# Altium PCB Balance Board.PcbDoc
Units mm, origin at the board's own origin, x right, y up, seen from the top; angles counter-clockwise.
Board outline 64.5 x 42.5 mm, 2 copper layers (Top Layer, Bottom Layer); 128 components, 72 nets, 307 pads, 49 vias.
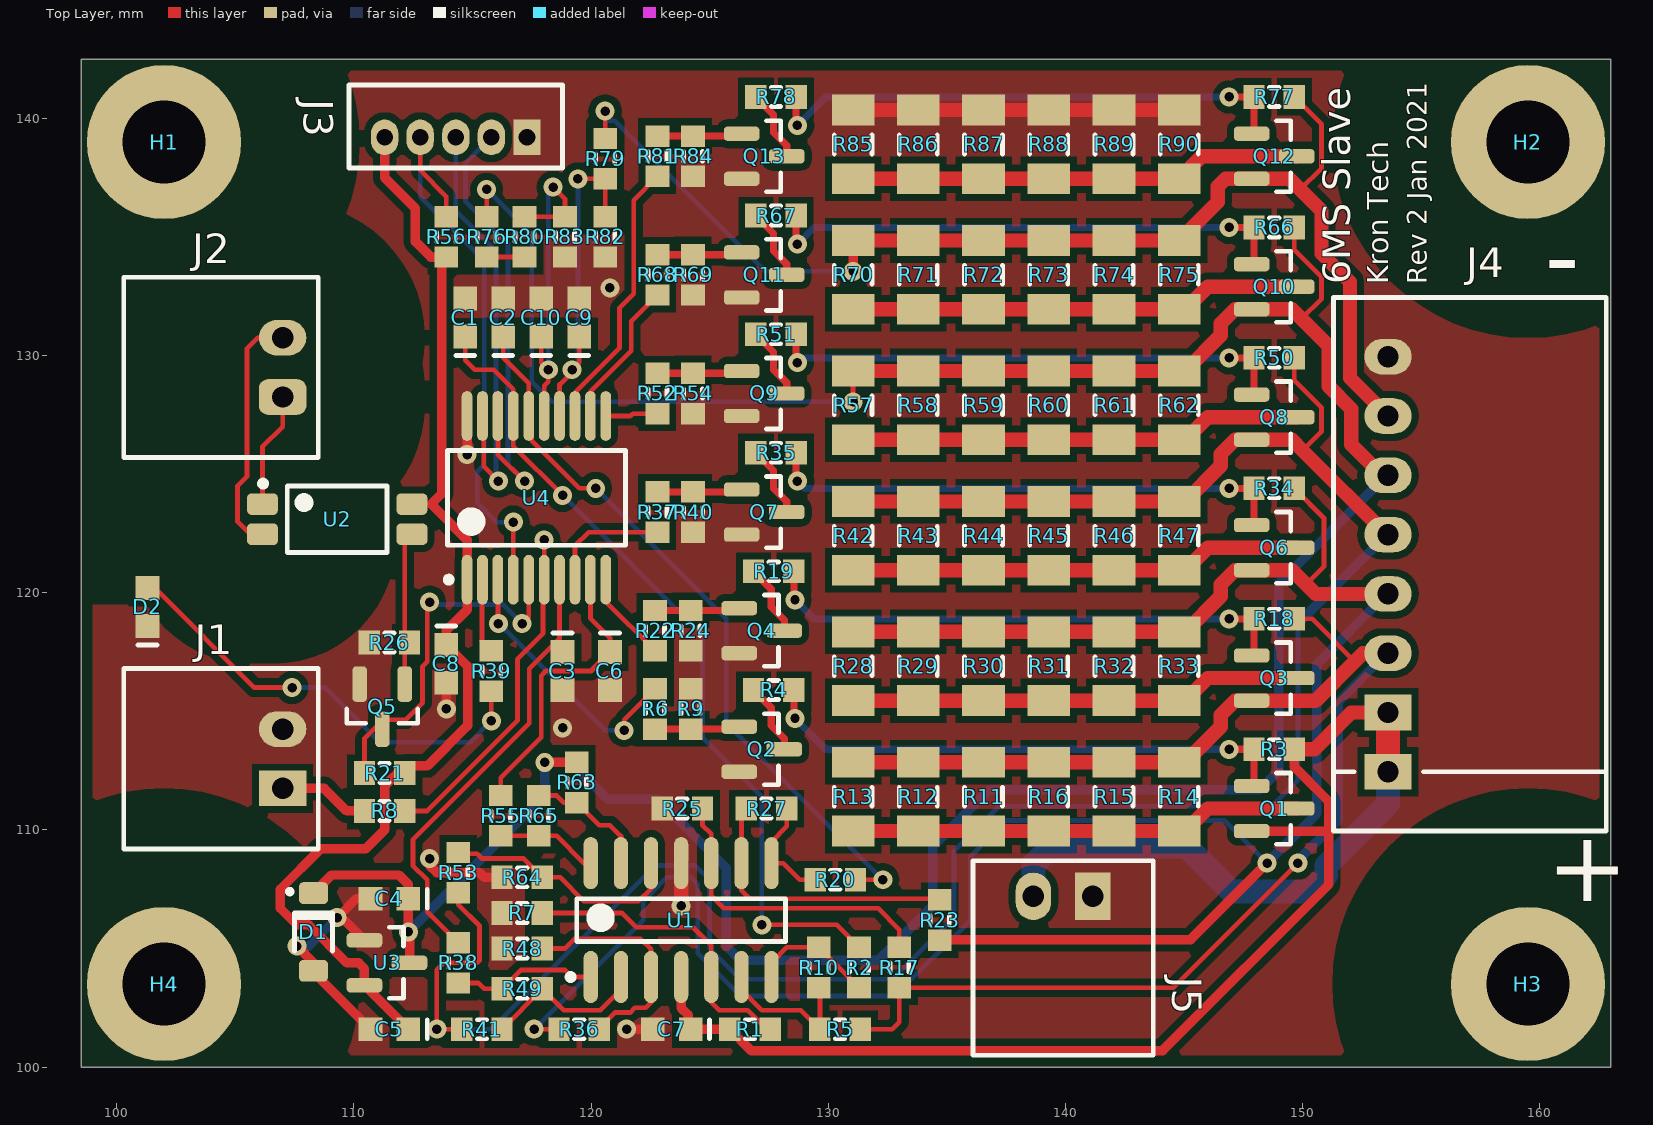
[diagram p0: Top Layer view]
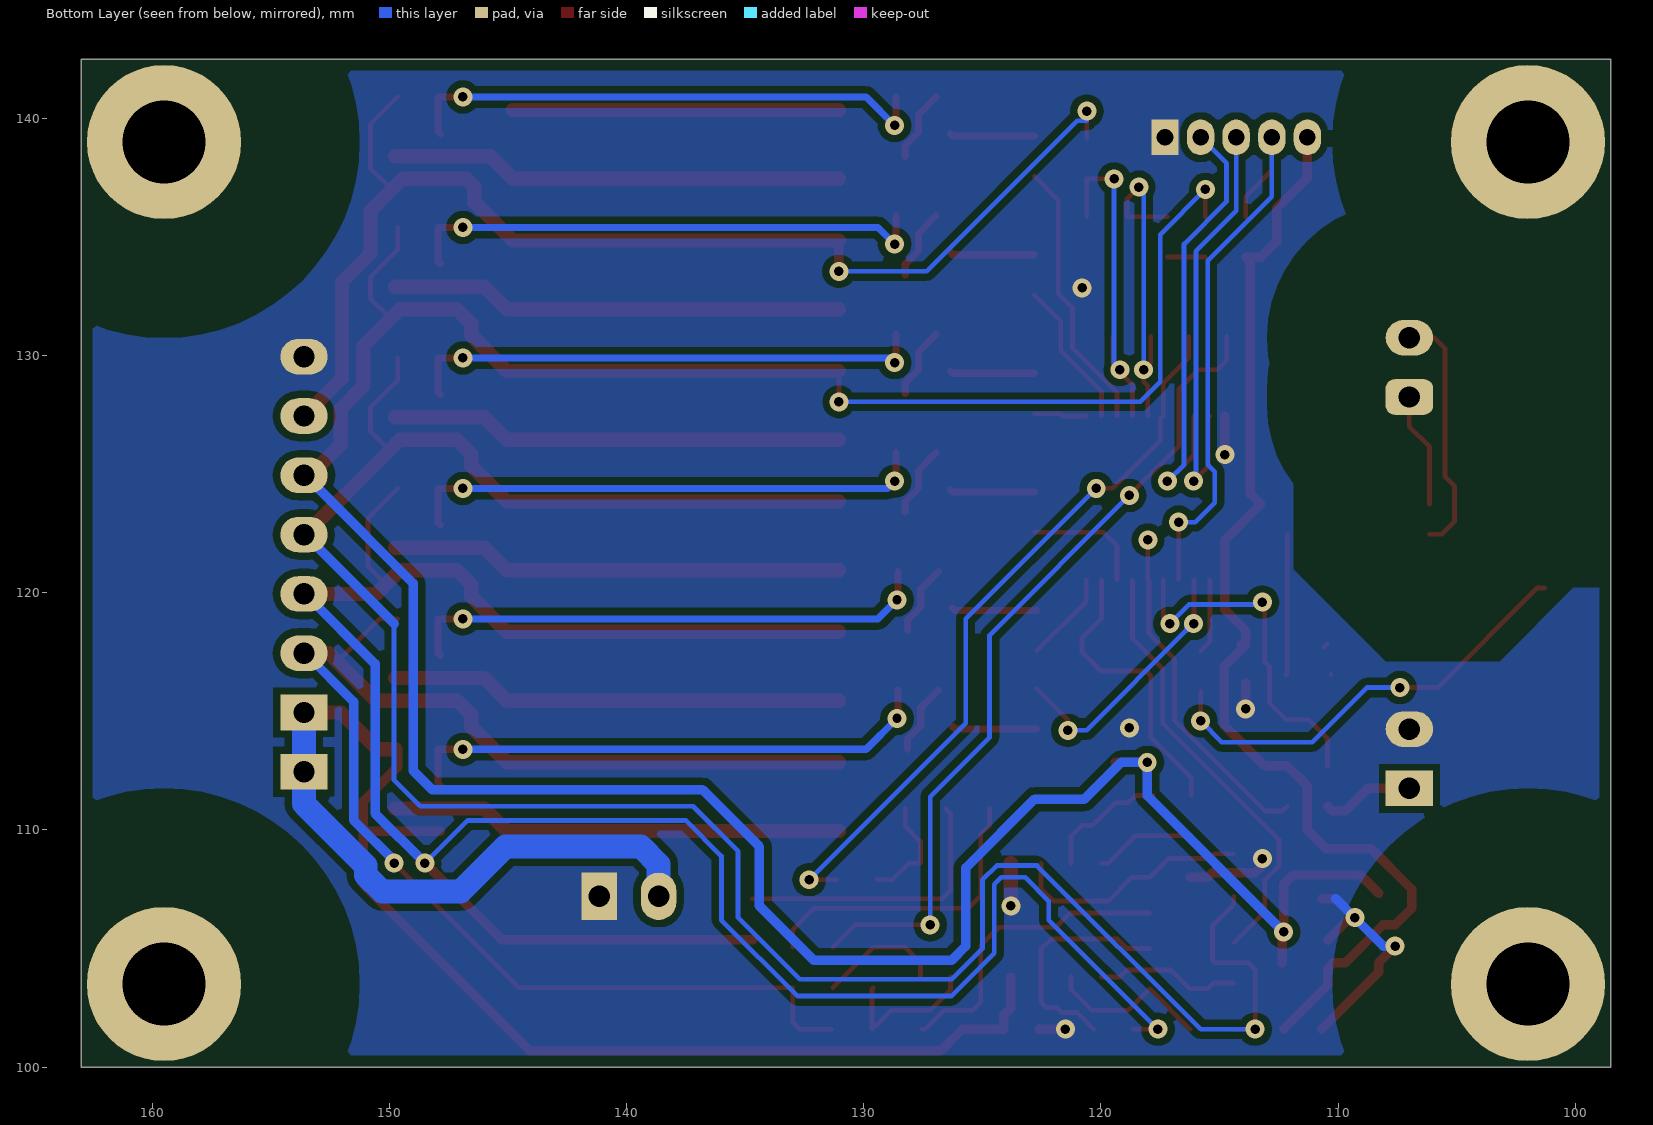
[diagram p1: Bottom Layer view, seen from below]

## Layer stack, top to bottom
Top Solder: solder mask 0.0102, Solder Resist, Dk 3.5
Top Layer: signal copper 0.0356
Dielectric1: dielectric 0.32, FR-4, Dk 4.8
Bottom Layer: signal copper 0.0356
Bottom Solder: solder mask 0.0102, Solder Resist, Dk 3.5

## Board outline
98.5,100 98.5,142.5 163,142.5 163,100

## Design rules (kind name [scope] priority, off if disabled: settings)
Clearance Clearance_ISO [InNetClass('ISO') vs NOT InNetClass('ISO')] p1: gap=5 ignorepadtopadclearanceinfootprint=FALSE except(0: Arc-Hole Track-Hole SMDPad-Hole THPad-Hole Via-Hole Fill-Hole Poly-Hole Region-Hole Text-Hole)
Clearance Clearance_Chassis [InNetClass('CHASSIS') vs NOT InNetClass('CHASSIS')] p2: gap=5 ignorepadtopadclearanceinfootprint=FALSE except(0: Arc-Hole Track-Hole SMDPad-Hole THPad-Hole Via-Hole Fill-Hole Poly-Hole Region-Hole Text-Hole)
Clearance Clearance_Plane [InPoly] p3: gap=0.3 ignorepadtopadclearanceinfootprint=FALSE except(0: Arc-Hole Track-Hole SMDPad-Hole THPad-Hole Via-Hole Fill-Hole Poly-Hole Region-Hole Text-Hole)
Clearance [All] p4: gap=0.2 ignorepadtopadclearanceinfootprint=FALSE except(0: Arc-Hole Track-Hole SMDPad-Hole THPad-Hole Via-Hole Fill-Hole Poly-Hole Region-Hole Text-Hole)
HoleSize [All] p1 off: absolutevalues=TRUE maxlimit=2.54 minlimit=0.025 maxpercent=80.000 minpercent=20.000
PolygonConnect PolygonConnect_Direct [IsVia    or (IsPad AND NOT OnLayer('Multi Layer'))] p1: connectstyle=Direct reliefconductorwidth=0.254 reliefentries=4 polygonreliefangle="90 Angle" airgapwidth=0.254
PolygonConnect [All] p2: connectstyle=Relief reliefconductorwidth=0.254 reliefentries=4 polygonreliefangle="90 Angle" airgapwidth=0.254
RoutingVias [All] p1: holewidth=0.3 width=0.6 viastyle="Through Hole" minholewidth=0.3 minwidth=0.6 maxholewidth=10 maxwidth=20
SilkToSilkClearance [All] p1 off: silktosilkclearance=0.254
SilkToSolderMaskClearance [IsPad] p1 off: minsilkscreentomaskgap=0.254 clearancetoexposedcopper=TRUE
SolderMaskExpansion [All] p1: expansion=0.102 istentingtop=FALSE
Width [All] p1: maxlimit=10 minlimit=0.2 preferedwidth=0.3
27 further rules are at their usual default settings.

## Classes and differential pairs
net class CHASSIS: CHASSIS CHASSIS1 CHASSIS2 CHASSIS3 CHASSIS4
net class ISO: NetJ2_1 NetJ2_2

## Components (designator, comment, footprint, x,y, rotation, side; value= is the part's Value field where it differs from the comment)
C1 "Cap Ceramic 0.1u 25V X7R 0603" CAPC1608N-0603 114.7,131.6 r90 top value=0.1u
C2 "Cap Ceramic 0.1u 25V X7R 0603" CAPC1608N-0603 116.3,131.6 r90 top value=0.1u
C3 "Cap Ceramic 0.1u 25V X7R 0603" CAPC1608N-0603 118.8,116.7 r270 top value=0.1u
C4 "Cap Ceramic 0.1u 25V X7R 0603" CAPC1608N-0603 111.5,107.1 r180 top value=0.1u
C5 "Cap Ceramic 0.1u 25V X7R 0603" CAPC1608N-0603 111.5,101.6 r180 top value=0.1u
C6 "Cap Ceramic 0.1u 25V X7R 0603" CAPC1608N-0603 120.8,116.7 r270 top value=0.1u
C7 "Cap Ceramic 0.1u 50V X7R 0603" CAPC1608N-0603 123.4,101.6 r180 top value=0.1u
C8 "Cap Ceramic 0.1u 25V X7R 0603" CAPC1608N-0603 113.9,117 r270 top value=0.1u
C9 "Cap Ceramic 0.1u 25V X7R 0603" CAPC1608N-0603 119.5,131.6 r90 top value=0.1u
C10 "Cap Ceramic 0.1u 25V X7R 0603" CAPC1608N-0603 117.9,131.6 r90 top value=0.1u
D1 "Diode Zener 10V 0.5W SOD-123" SOD-123 108.3,105.7 r270 top value=10V
D2 "LED Green 160° 0603" CAPC1608N-0603 101.3,119.4 r90 top value="LG Q971-KN-1"
H1 "Mounting Hole" "HOLE MOUNTING 3MM"#1 102.1,138.9 r0 top
H2 "Mounting Hole" "HOLE MOUNTING 3MM"#2 165.5,139 r0 top
H3 "Mounting Hole" "HOLE MOUNTING 3MM"#2 165.5,103.5 r0 top
H4 "Mounting Hole" "HOLE MOUNTING 3MM"#3 102,103.5 r0 top
J1 "Conn Header 2.5mm RA 2-Pos EH" S2B-EH#1 107,113 r90 top value=S2B-EH(LF)(SN)
J2 "Conn Header 2.5mm RA 2-Pos EH" S2B-EH#2 107,129.5 r90 top value=S2B-EH(LF)(SN)
J3 "Conn Header 1.5mm Vert 5-Pos ZH" B5B-ZR 114.3,139.2 r180 top value=B5B-ZR(LF)(SN)
J4 "Conn Header 2.5mm RA 7-Pos XH" S7B-XH&78B-XH-REV 153.6,122.45 r270 top value=S7B-XH-A(LF)(SN)
J5 "Conn Header 2.5mm RA 2-Pos EH" S2B-EH#1 139.9,107.2 r180 top value=S2B-EH(LF)(SN)
Q1 "Tran PNP Darl 30V 500mA SOT-23" SOT23-3N 148.8,110.9 r0 top value=MMBTA64-7-F
Q2 "Tran NPN 40V 200mA SOT-23" SOT23-3N 127.2,113.4 r0 top value=MMBT3904
Q3 "Tran PNP Darl 30V 500mA SOT-23" SOT23-3N 148.8,116.4 r0 top value=MMBTA64-7-F
Q4 "Tran NPN 40V 200mA SOT-23" SOT23-3N 127.2,118.4 r0 top value=MMBT3904
Q5 "Tran NPN 40V 200mA SOT-23" SOT23-3N 111.2,115.2 r270 top value=MMBT3904
Q6 "Tran PNP Darl 30V 500mA SOT-23" SOT23-3N 148.8,121.9 r0 top value=MMBTA64-7-F
Q7 "Tran NPN 40V 200mA SOT-23" SOT23-3N 127.3,123.4 r0 top value=MMBT3904
Q8 "Tran PNP Darl 30V 500mA SOT-23" SOT23-3N 148.8,127.4 r0 top value=MMBTA64-7-F
Q9 "Tran NPN 40V 200mA SOT-23" SOT23-3N 127.3,128.4 r0 top value=MMBT3904
Q10 "Tran PNP Darl 30V 500mA SOT-23" SOT23-3N 148.8,132.9 r0 top value=MMBTA64-7-F
Q11 "Tran NPN 40V 200mA SOT-23" SOT23-3N 127.3,133.4 r0 top value=MMBT3904
Q12 "Tran PNP Darl 30V 500mA SOT-23" SOT23-3N 148.8,138.4 r0 top value=MMBTA64-7-F
Q13 "Tran NPN 40V 200mA SOT-23" SOT23-3N 127.3,138.4 r0 top value=MMBT3904
R1 "Res 499K 1/10W 1% 0603" RESC1608N-0603 126.7,101.6 r0 top value=499K
R2 "Res 10.0K 1/10W 1% 0603" RESC1608N-0603 131.3,104.2 r90 top value=10K0
R3 "Res 100K 1/10W 1% 0603" RESC1608N-0603 148.8,113.4 r0 top value=100K
R4 "Res 280K 1/10W 1% 0603" RESC1608N-0603 127.7,115.9 r180 top value=280K
R5 "Res 499K 1/10W 1% 0603" RESC1608N-0603 130.5,101.6 r180 top value=499K
R6 "Res 10.0K 1/10W 1% 0603" RESC1608N-0603 122.7,115.1 r90 top value=10K0
R7 "Res 200K 1/10W 1% 0603" RESC1608N-0603 117.1,106.5 r0 top value=200K
R8 "Res 1.00K 1/10W 1% 0603" RESC1608N-0603 111.3,110.8 r0 top value=1K00
R9 "Res 10.0K 1/10W 1% 0603" RESC1608N-0603 124.2,115.1 r270 top value=10K0
R10 "Res 200K 1/10W 1% 0603" RESC1608N-0603 129.6,104.2 r90 top value=200K
R11 "Res 121R 1/4W 1% 1206" RESC3216N-1206 136.55,111.4 r270 top value=121R
R12 "Res 121R 1/4W 1% 1206" RESC3216N-1206 133.8,111.4 r270 top value=121R
R13 "Res 121R 1/4W 1% 1206" RESC3216N-1206 131.05,111.4 r270 top value=121R
R14 "Res 121R 1/4W 1% 1206" RESC3216N-1206 144.8,111.4 r270 top value=121R
R15 "Res 121R 1/4W 1% 1206" RESC3216N-1206 142.05,111.4 r270 top value=121R
R16 "Res 121R 1/4W 1% 1206" RESC3216N-1206 139.3,111.4 r270 top value=121R
R17 "Res 499K 1/10W 1% 0603" RESC1608N-0603 133,104.2 r90 top value=499K
R18 "Res 100K 1/10W 1% 0603" RESC1608N-0603 148.8,118.9 r0 top value=100K
R19 "Res 280K 1/10W 1% 0603" RESC1608N-0603 127.7,120.9 r180 top value=280K
R20 "Res 10.0K 1/10W 1% 0603" RESC1608N-0603 130.3,107.9 r0 top value=10K0
R21 "Res 2.32K 1/10W 1% 0603" RESC1608N-0603 111.3,112.4 r0 top value=2K32
R22 "Res 10.0K 1/10W 1% 0603" RESC1608N-0603 122.7,118.4 r270 top value=10K0
R23 "Res 499K 1/10W 1% 0603" RESC1608N-0603 134.7,106.2 r90 top value=499K
R24 "Res 10.0K 1/10W 1% 0603" RESC1608N-0603 124.2,118.4 r90 top value=10K0
R25 "Res 200K 1/10W 1% 0603" RESC1608N-0603 123.85,110.9 r0 top value=200K
R26 "Res 4.99K 1/10W 1% 0603" RESC1608N-0603 111.5,117.9 r0 top value=4K99
R27 "Res 200K 1/10W 1% 0603" RESC1608N-0603 127.4,110.9 r0 top value=200K
R28 "Res 121R 1/4W 1% 1206" RESC3216N-1206 131.05,116.9 r270 top value=121R
R29 "Res 121R 1/4W 1% 1206" RESC3216N-1206 133.8,116.9 r270 top value=121R
R30 "Res 121R 1/4W 1% 1206" RESC3216N-1206 136.55,116.9 r270 top value=121R
R31 "Res 121R 1/4W 1% 1206" RESC3216N-1206 139.3,116.9 r270 top value=121R
R32 "Res 121R 1/4W 1% 1206" RESC3216N-1206 142.05,116.9 r270 top value=121R
R33 "Res 121R 1/4W 1% 1206" RESC3216N-1206 144.8,116.9 r270 top value=121R
R34 "Res 100K 1/10W 1% 0603" RESC1608N-0603 148.8,124.4 r0 top value=100K
R35 "Res 280K 1/10W 1% 0603" RESC1608N-0603 127.8,125.9 r180 top value=280K
R36 "Res 499K 1/10W 1% 0603" RESC1608N-0603 119.5,101.6 r0 top value=499K
R37 "Res 10.0K 1/10W 1% 0603" RESC1608N-0603 122.8,123.4 r270 top value=10K0
R38 "Res 10.0K 1/10W 1% 0603" RESC1608N-0603 114.4,104.4 r90 top value=10K0
R39 "Res 120R 1/10W 1% 0603" RESC1608N-0603 115.8,116.7 r90 top value=120R
R40 "Res 10.0K 1/10W 1% 0603" RESC1608N-0603 124.3,123.4 r90 top value=10K0
R41 "Res 499K 1/10W 1% 0603" RESC1608N-0603 115.4,101.6 r0 top value=499K
R42 "Res 121R 1/4W 1% 1206" RESC3216N-1206 131.05,122.4 r270 top value=121R
R43 "Res 121R 1/4W 1% 1206" RESC3216N-1206 133.8,122.4 r270 top value=121R
R44 "Res 121R 1/4W 1% 1206" RESC3216N-1206 136.55,122.4 r270 top value=121R
R45 "Res 121R 1/4W 1% 1206" RESC3216N-1206 139.3,122.4 r270 top value=121R
R46 "Res 121R 1/4W 1% 1206" RESC3216N-1206 142.05,122.4 r270 top value=121R
R47 "Res 121R 1/4W 1% 1206" RESC3216N-1206 144.8,122.4 r270 top value=121R
R48 "Res 200K 1/10W 1% 0603" RESC1608N-0603 117.1,105 r0 top value=200K
R49 "Res 200K 1/10W 1% 0603" RESC1608N-0603 117.1,103.3 r180 top value=200K
R50 "Res 100K 1/10W 1% 0603" RESC1608N-0603 148.8,129.9 r0 top value=100K
R51 "Res 100K 1/10W 1% 0603" RESC1608N-0603 127.8,130.9 r180 top value=100K
R52 "Res 10.0K 1/10W 1% 0603" RESC1608N-0603 122.8,128.4 r270 top value=10K0
R53 "Res 499K 1/10W 1% 0603" RESC1608N-0603 114.4,108.2 r90 top value=499K
R54 "Res 10.0K 1/10W 1% 0603" RESC1608N-0603 124.3,128.4 r90 top value=10K0
R55 "Res 10.0K 1/10W 1% 0603" RESC1608N-0603 116.2,110.6 r90 top value=10K0
R56 "Res 10.0K 1/10W 1% 0603" RESC1608N-0603 113.9,135 r270 top value=10K0
R57 "Res 121R 1/4W 1% 1206" RESC3216N-1206 131.05,127.9 r270 top value=121R
R58 "Res 121R 1/4W 1% 1206" RESC3216N-1206 133.8,127.9 r270 top value=121R
R59 "Res 121R 1/4W 1% 1206" RESC3216N-1206 136.55,127.9 r270 top value=121R
R60 "Res 121R 1/4W 1% 1206" RESC3216N-1206 139.3,127.9 r270 top value=121R
R61 "Res 121R 1/4W 1% 1206" RESC3216N-1206 142.05,127.9 r270 top value=121R
R62 "Res 121R 1/4W 1% 1206" RESC3216N-1206 144.8,127.9 r270 top value=121R
R63 "Res 499K 1/10W 1% 0603" RESC1608N-0603 119.4,112 r270 top value=499K
R64 "Res 200K 1/10W 1% 0603" RESC1608N-0603 117.1,108 r0 top value=200K
R65 "Res 200K 1/10W 1% 0603" RESC1608N-0603 117.8,110.6 r270 top value=200K
R66 "Res 100K 1/10W 1% 0603" RESC1608N-0603 148.8,135.4 r0 top value=100K
R67 "Res 100K 1/10W 1% 0603" RESC1608N-0603 127.8,135.9 r180 top value=100K
R68 "Res 10.0K 1/10W 1% 0603" RESC1608N-0603 122.8,133.4 r270 top value=10K0
R69 "Res 10.0K 1/10W 1% 0603" RESC1608N-0603 124.3,133.4 r90 top value=10K0
R70 "Res 121R 1/4W 1% 1206" RESC3216N-1206 131.05,133.4 r270 top value=121R
R71 "Res 121R 1/4W 1% 1206" RESC3216N-1206 133.8,133.4 r270 top value=121R
R72 "Res 121R 1/4W 1% 1206" RESC3216N-1206 136.55,133.4 r270 top value=121R
R73 "Res 121R 1/4W 1% 1206" RESC3216N-1206 139.3,133.4 r270 top value=121R
R74 "Res 121R 1/4W 1% 1206" RESC3216N-1206 142.05,133.4 r270 top value=121R
R75 "Res 121R 1/4W 1% 1206" RESC3216N-1206 144.8,133.4 r270 top value=121R
R76 "Res 100K 1/10W 1% 0603" RESC1608N-0603 115.6,135 r90 top value=100K
R77 "Res 100K 1/10W 1% 0603" RESC1608N-0603 148.8,140.9 r0 top value=100K
R78 "Res 3.32K 1/10W 1% 0603" RESC1608N-0603 127.8,140.9 r180 top value=3K32
R79 "Res 150K 1/10W 1% 0603" RESC1608N-0603 120.6,138.3 r90 top value=150K
R80 "Res 280K 1/10W 1% 0603" RESC1608N-0603 117.2,135 r270 top value=280K
R81 "Res 10.0K 1/10W 1% 0603" RESC1608N-0603 122.8,138.4 r270 top value=10K0
R82 "Res 100K 1/10W 1% 0603" RESC1608N-0603 120.6,135 r90 top value=100K
R83 "Res 100K 1/10W 1% 0603" RESC1608N-0603 118.9,135 r90 top value=100K
R84 "Res 10.0K 1/10W 1% 0603" RESC1608N-0603 124.3,138.4 r90 top value=10K0
R85 "Res 121R 1/4W 1% 1206" RESC3216N-1206 131.05,138.9 r270 top value=121R
R86 "Res 121R 1/4W 1% 1206" RESC3216N-1206 133.8,138.9 r270 top value=121R
R87 "Res 121R 1/4W 1% 1206" RESC3216N-1206 136.55,138.9 r270 top value=121R
R88 "Res 121R 1/4W 1% 1206" RESC3216N-1206 139.3,138.9 r270 top value=121R
R89 "Res 121R 1/4W 1% 1206" RESC3216N-1206 142.05,138.9 r270 top value=121R
R90 "Res 121R 1/4W 1% 1206" RESC3216N-1206 144.8,138.9 r270 top value=121R
U1 "IC Op-Amp Low Power RRIO 32V 14-SOIC" SOIC127P600-14N 123.8,106.2 r90 top value=LP324DR
U2 "IC Optocoupler Bi-Di LED 80-300% SOIC4" MFP127P4.4-4 109.3,123.1 r0 top value=80-300%
U3 "IC Voltage Reg LDO 3.3V SOT-23" SOT23-3N 111.4,104.4 r0 top value=3.3V
U4 "IC Micro PIC16F1828 20-SSOP" SOP65P780X200-20N 117.7,124 r90 top value=PIC16F1828-I/SS

## Footprints (in the part's own frame and the unit in brackets; to place one, negate y for a bottom-side part, rotate by r counter-clockwise, add the part's x,y. Pads: shape width x height; smd on the part's side, far side on the other; paste and mask are expansions set on the pad)
B5B-ZR [mm] "CONN HEADER ZH TOP 5POS 1.5MM"
  rect 1.15x1.5 hole 0.7: 1(-3,0)
  oval 1.15x1.5 hole 0.7: 2(-1.5,0) 3(0,0) 4(1.5,0) 5(3,0)
  silkscreen extent -4.5,-2.2 4.5,1.3, body extent -4.5,-2.2 4.5,1.3, height 4.5
CAPC1608N-0603 [mm] "Chip Capacitor, Body 1.6x0.8mm, IPC Medium Density"
  rect 1x1 smd: 1(-0.8,0) 2(0.8,0)
  silkscreen extent -1.6,-0.4 -1.6,0.4, body extent -0.87,-0.48 0.87,0.48, height 0.85
"HOLE MOUNTING 3MM"#1 [mm] "3mm hole with 300mil pad"
  round 6.5 hole 3.5: 1(-0.1,0.1)
"HOLE MOUNTING 3MM"#2 [mm] "3mm hole with 300mil pad"
  round 6.5 hole 3.5: 1(-6,0)
"HOLE MOUNTING 3MM"#3 [mm] "3mm hole with 300mil pad"
  round 6.5 hole 3.5: 1(0,0)
MFP127P4.4-4 [mm] "Mini Flat Pack, 4-Leads, Body 4.4x2.8mm, Pitch 1.27mm"
  rrect40% 1.3x0.9 smd: 1(-3.15,0.635) 2(-3.15,-0.635) 3(3.15,-0.635) 4(3.15,0.635)
  silkscreen extent -3.25,-1.4 2.1,1.62, body extent -2.2,-1.4 2.2,1.4, height 2.1
RESC1608N-0603 [mm] "Chip Resistor, Body 1.6x0.8mm, IPC Medium Density"
  rect 0.9x1 smd: 1(-0.85,0) 2(0.85,0)
  silkscreen extent -0.2,-0.4 0.2,0.4, body extent -0.85,-0.48 0.85,0.48, height 0.6
RESC3216N-1206 [mm] "Chip Resistor, Body 3.2x1.6mm, IPC Medium Density"
  rect 1.3x1.8 smd: 1(-1.45,0) 2(1.45,0)
  silkscreen extent -0.4,-0.8 0.4,0.8, body extent -1.68,-0.87 1.68,0.87, height 0.71
S2B-EH#1 [mm] "CONN HEADER EH SIDE 2POS 2.5MM"
  rect 1.5x2 hole 0.9: 1(-1.25,0)
  oval 1.5x2 hole 0.9: 2(1.25,0)
  silkscreen extent -3.8,-1.5 3.8,6.7, body extent -3.75,-1.5 3.75,6.7, height 4.2
S2B-EH#2 [mm] "CONN HEADER EH SIDE 2POS 2.5MM"
  rrect50% 1.5x2 hole 0.9: 1(-1.25,0)
  oval 1.5x2 hole 0.9: 2(1.25,0)
  silkscreen extent -3.8,-1.5 3.8,6.7, body extent -3.75,-1.5 3.75,6.7, height 4.2
S7B-XH&78B-XH-REV [mm] "CONN HEADER XH SIDE 7 OR 8POS 2.5MM"
  rect 1.5x2 hole 0.9: 0(10,0) 1(7.5,0)
  oval 1.5x2 hole 0.9: 2(5,0) 3(2.5,0) 4(0,0) 5(-2.5,0) 6(-5,0) 7(-7.5,0)
  silkscreen extent -10,-2.3 12.5,9.2, body extent -9.95,-2.3 9.95,9.2, height 6.15
SOD-123 [mil] "Small Outline Diode"
  rrect40% 36x48 smd: 1(-64.5,0) 2(64.5,0)
  silkscreen extent -71,-43 31,31, body extent -55,-35 55,35, height 53
SOIC127P600-14N [mm] "SOIC, 14-Leads, Body 8.7x3.9mm, Pitch 1.27mm, IPC Medium Density"
  oval 2.2x0.6 smd: 1(-2.4,3.81) 2(-2.4,2.54) 3(-2.4,1.27) 4(-2.4,0) 5(-2.4,-1.27) 6(-2.4,-2.54) 7(-2.4,-3.81) 8(2.4,-3.81) 9(2.4,-2.54) 10(2.4,-1.27) 11(2.4,0) 12(2.4,1.27) 13(2.4,2.54) 14(2.4,3.81)
  silkscreen extent -2.52,-4.4 0.9,4.78, body extent -2,-4.38 2,4.38, height 1.75
SOP65P780X200-20N [mm] "SOP, 20-Leads, Body 7.5x5.6mm (max), Pitch 0.65mm, IPC Medium Density"
  oval 2.1x0.45 smd: 1(-3.45,2.925) 2(-3.45,2.275) 3(-3.45,1.625) 4(-3.45,0.975) 5(-3.45,0.325) 6(-3.45,-0.325) 7(-3.45,-0.975) 8(-3.45,-1.625) 9(-3.45,-2.275) 10(-3.45,-2.925) 11(3.45,-2.925) 12(3.45,-2.275) 13(3.45,-1.625) 14(3.45,-0.975) 15(3.45,-0.325) 16(3.45,0.325) 17(3.45,0.975) 18(3.45,1.625) 19(3.45,2.275) 20(3.45,2.925)
  silkscreen extent -3.57,-3.75 2,3.82, body extent -2.8,-3.75 2.8,3.75, height 2
SOT23-3N [mm] "SOT23, 3-Leads, Body 2.9x1.3mm, Pitch 0.95mm, Lead Span 2.5mm, IPC Medium Density"
  rrect50% 1.5x0.6 smd: 1(-0.95,0.95) 2(-0.95,-0.95) 3(0.95,0)
  silkscreen extent 0.1,-1.5 0.7,1.5, body extent -0.7,-1.5 0.7,1.5, height 1.1

## Part data
C1 C2 C3 C4 C5 C6 C8 C9 C10: library part C0603C104K3RACTU, Dist=Digi-Key, Dist P/N=399-1281-1-ND, Mfg=Kemet, Mfgr P/N=C0603C104K3RACTU, Price=0.079
C7: library part CC0603KRX7R9BB104, Dist=Digi-Key, Dist P/N=311-1344-1-ND, Mfg=Yageo, Mfgr P/N=CC0603KRX7R9BB104, Price=0.35
D1: library part BZT52C10-TP, Datasheet=http://61.222.192.61/mccsemi/up_pdf/MMSZ5221-MMSZ5259(SOD123).pdf, Dist=Digi-Key, Dist P/N=BZT52C10-TPMSCT-ND, Mfg=MCC, Mfgr P/N=BZT52C10-TP, Price=0.38
D2: library part "LG Q971-KN-1", Dist=Digi-Key, Dist P/N=475-1409-1-ND, HelpURL=http://catalog.osram-os.com/catalogue/catalogue.do;jsessionid=60BD7AD44689CBF6EBE1906F01C7D3CB?act=downloadFile&favOid=0200000300015082000200b6, Mfg=Osram, Mfgr P/N="LG Q971-KN-1", Price=0.11
H1 H2 H3 H4: library part "Hole Mounting"
J1 J2 J5: library part S2B-EH(LF)(SN), Dist=Digi-Key, Dist P/N=455-1625-ND, HelpURL=http://www.jst-mfg.com/product/pdf/eng/eEH.pdf, Mfg=JST, Mfgr P/N=S2B-EH(LF)(SN), Price=0.16
J3: library part B5B-ZR(LF)(SN), Dist=Digi-Key, Dist P/N=455-1660-ND, HelpURL=http://www.jst-mfg.com/product/pdf/eng/eZH.pdf, Mfg=JST, Mfgr P/N=B5B-ZR(LF)(SN), Price=0.2
J4: library part S8B-XH-A(LF)(SN)_CUST, Dist=Digi-Key, Dist P/N=455-2240-ND, HelpURL=http://www.jst-mfg.com/product/pdf/eng/eXH.pdf, Mfg=JST, Mfgr P/N=S7B-XH-A(LF)(SN), Price=0.43
Q1 Q3 Q6 Q8 Q10 Q12: library part MMBTA64-7-F, Dist=Digi-Key, Dist P/N=MMBTA64-FDICT-ND, HelpURL=http://www.diodes.com/datasheets/ds30055.pdf, Mfg="Diodes Inc", Mfgr P/N=MMBTA64-7-F, Price=0.27
Q2 Q4 Q5 Q7 Q9 Q11 Q13: library part MMBT3904, Datasheet=http://www.fairchildsemi.com/ds/MM/MMBT3904.pdf, Dist=Digi-Key, Dist P/N=MMBT3904FSCT-ND, Mfg=Fairchild, Mfgr P/N=MMBT3904, Price=0.37
R1 R5 R17 R23 R36 R41 R53 R63: library part ERJ-3EKF4993V, Dist=Digi-Key, Dist P/N=P499KHCT-ND, Mfg=Panasonic, Mfgr P/N=ERJ-3EKF4993V, Price=0.05
R2 R6 R9 R20 R22 R24 R37 R38 R40 R52 R54 R55 R56 R68 R69 R81 R84: library part ERJ-3EKF1002V, Dist=Digi-Key, Dist P/N=P10.0KHCT-ND, Mfg=Panasonic, Mfgr P/N=ERJ-3EKF1002V, Price=0.05
R3 R18 R34 R50 R51 R66 R67 R76 R77 R82 R83: library part ERJ-3EKF1003V, Dist=Digi-Key, Dist P/N=P100KHCT-ND, Mfg=Panasonic, Mfgr P/N=ERJ-3EKF1003V, Price=0.05
R4 R19 R35 R80: library part ERJ-3EKF2803V, Dist=Digi-Key, Dist P/N=P280KHCT-ND, Mfg=Panasonic, Mfgr P/N=ERJ-3EKF2803V, Price=0.05
R7 R10 R25 R27 R48 R49 R64 R65: library part ERJ-3EKF2003V, Dist=Digi-Key, Dist P/N=P200KHCT-ND, Mfg=Panasonic, Mfgr P/N=ERJ-3EKF2003V, Price=0.05
R8: library part ERJ-3EKF1001V, Dist=Digi-Key, Dist P/N=P1.00KHCT-ND, Mfg=Panasonic, Mfgr P/N=ERJ-3EKF1001V, Price=0.05
R11 R12 R13 R14 R15 R16 R28 R29 R30 R31 R32 R33 R42 R43 R44 R45 R46 R47 R57 R58 R59 R60 R61 R62 R70 R71 R72 R73 R74 R75 R85 R86 R87 R88 R89 R90: library part ERJ-8ENF1210V, Dist=Digi-Key, Dist P/N=P121FCT-ND, HelpURL=http://industrial.panasonic.com/www-cgi/jvcr13pz.cgi?E+PZ+3+AOA0002+ERJ8ENF22R1V+7+WW, Mfg=Panasonic, Mfgr P/N=ERJ-8ENF1210V, Price=0.10
R21: library part ERJ-3EKF2321V, Dist=Digi-Key, Dist P/N=P2.32KHCT-ND, Mfg=Panasonic, Mfgr P/N=ERJ-3EKF2321V, Price=0.05
R26: library part ERJ-3EKF4991V, Dist=Digi-Key, Dist P/N=P4.99KHCT-ND, Mfg=Panasonic, Mfgr P/N=ERJ-3EKF4991V, Price=0.05
R39: library part ERJ-3EKF1200V, Dist=Digi-Key, Dist P/N=P120HCT-ND, Mfg=Panasonic, Mfgr P/N=ERJ-3EKF1200V, Price=0.05
R78: library part ERJ-3EKF3322V, Dist=Digi-Key, Dist P/N=P3.32KHCT-ND, Mfg=Panasonic, Mfgr P/N=ERJ-3EKF3322V, Price=0.05
R79: library part ERJ-3EKF1503V_1, Dist=Digi-Key, Dist P/N=P150KHCT-ND, Mfg=Panasonic, Mfgr P/N=ERJ-3EKF1503V, Price=0.05
U1: library part LP324DR, Dist=Digi-Key, Dist P/N=296-17953-1-ND, HelpURL=http://www.ti.com/lit/ds/symlink/lp2902.pdf, Mfg=TI, Mfgr P/N=LP324DR, Price=0.62
U2: library part TCMT1600, Dist=Digikey, Dist P/N=751-1374-1-ND, HelpURL=http://www.vishay.com/doc?83512, Mfg=Vishay, Mfgr P/N=TCMT1600, Price=0.73
U3: library part MCP1702T-3302E/CB, Dist=Digi-Key, Dist P/N=MCP1702T-3302E/CBCT-ND, HelpURL=http://ww1.microchip.com/downloads/en/DeviceDoc/22008E.pdf, Mfg=Microchip, Mfgr P/N=MCP1702T-3302E/CB, Price=0.59
U4: library part PIC16F1828-I/SS, Dist=Digi-Key, Dist P/N=PIC16F1828-I/SS-ND, HelpURL=http://ww1.microchip.com/downloads/en/DeviceDoc/41419D.pdf, Mfg=Microchip, Mfgr P/N=PIC16F1828-I/SS, Price=1.74

## Via types
v1: diameter 0.8, hole 0.4, Top Layer to Bottom Layer, tented both sides, 49 vias

## Nets (pads, with @x,y where several pads share a name; then routed paths per layer and width w, separated by ;. In a path a pad name is that pad's centre, name@x,y a point inside that pad or via, vN(x,y) a via of type N, cw(c..) or ccw(c..) an arc to the next point about the centre after c; other vN are vias at no path point)
BAL1: J4.6 Q12.2 R70.1 R71.1 R72.1 R73.1 R74.1 R75.1 R77.2 R79.2 | length 51.9
  Top Layer w0.2: R79.2 v1(120.6,140.3) ; R77.2 150.8,139.75 150.8,137.9 149.9,137
  Top Layer w0.4: v1(131.05,133.55) R70.1
  Top Layer w0.6: R70.1 R73.1 R74.1 R75.1 146.425,136.475 146.425,137.125 146.75,137.45 Q12.2 149.45,137.45 149.9,137 150.8,136.1 150.8,134.3 152,133.1 152,129.05 J4.6
  Bottom Layer w0.2: 120.6,139.9 121,139.9 127.35,133.55 v1(131.05,133.55)
BAL2: C4.1 D1.1 J4.5 Q10.2 R57.1 R58.1 R59.1 R60.1 R61.1 R62.1 R63.1 R66.2 R76.2 U3.3 | length 131.9
  Top Layer w0.2: R76.2 v1(115.6,137) ; v1(131.05,128.05) R57.1 ; R66.2 149.65,134.45 150.8,133.3 150.8,132.4 149.95,131.55
  Top Layer w0.4: D1.1 109.062,108.1 111.9,108.1 112.3,107.7 C4.1 v1(112.3,105.7) 112.35,105.65 U3.3 ; v1(118.05,112.85) R63.1
  Top Layer w0.5: J4.5@153.35,124.95 J4.5
  Top Layer w0.6: R57.1 R60.1 R61.1 145.05,129.35 146.55,130.85 146.55,131.35 147.15,131.95 Q10.2 149.55,131.95 149.95,131.55 151.1,130.4 151.1,128.7 152.05,127.75 152.05,126.25 J4.5@153.35,124.95
  Bottom Layer w0.2: v1(115.6,137) 117.5,135.1 117.5,128.9 118.35,128.05 v1(131.05,128.05)
  Bottom Layer w0.4: v1(112.3,105.7) 118.05,111.45 v1(118.05,112.85) 119.15,112.85 120.7,111.3 122.8,111.3 125.7,108.4 125.7,105.1 126.3,104.5 132.1,104.5 134.4,106.8 134.4,109.3 136.8,111.7 148.2,111.7 149,112.5 149,120.4 J4.5@152.95,124.35
BAL3: J4.4 Q8.2 R41.1 R42.1 R43.1 R44.1 R45.1 R46.1 R47.1 R50.2 R53.1 | length 98.8
  Top Layer w0.2: R53.1@114.4,107.194 114.4,106.85 115.3,105.95 115.3,104.5 115.2,104.4 113.8,104.4 113.5,104.1 v1(113.5,101.6) R41.1 ; R50.2 149.65,128.95 150.8,127.8 150.8,126.8 150,126
  Top Layer w0.6: R42.1 R43.1 R44.1 145.05,123.85 146.55,125.35 146.55,125.85 147.15,126.45 Q8.2 149.55,126.45 150,126 153.55,122.45 J4.4
  Bottom Layer w0.2: v1(113.5,101.6) 115.8,101.6 122.7,108.5 124.4,108.5 125,107.9 125,105 126.3,103.7 132.7,103.7 135.3,106.3 135.3,109.1 137.2,111 148.7,111 149.8,112.1 149.8,118.7
  Bottom Layer w0.4: 149.8,118.7 J4.4@153.575,122.475
BAL4: J4.3 Q6.2 R23.1 R28.1 R29.1 R30.1 R31.1 R32.1 R33.1 R34.2 R36.1 | length 102.1
  Top Layer w0.2: v1(117.6,101.6) R36.1 ; R34.2 150.9,123.15 150.9,121.1 150.15,120.35
  Top Layer w0.4: R23.1@134.675,105.375 145.275,105.375 v1(148.5,108.6)
  Top Layer w0.6: R28.1 R31.1 R32.1 145.05,118.35 146.55,119.85 146.55,120.35 147.15,120.95 Q6.2 149.55,120.95 150.15,120.35 150.55,119.95 J4.3
  Bottom Layer w0.2: v1(117.6,101.6) 122.2,106.2 122.2,107 123.2,108 124.2,108 124.5,107.7 124.5,104.8 126.3,103 132.8,103 136,106.2 136,108.9 137.5,110.4 146.7,110.4 v1(148.5,108.6)
  Bottom Layer w0.4: v1(148.5,108.6) 150.6,110.7 150.6,117 153.525,119.925 J4.3@153.625,119.925
BAL5: J4.2 Q3.2 R5.1 R11.1 R12.1 R13.1 R14.1 R15.1 R16.1 R17.1 R18.2 | length 60.8
  Top Layer w0.2: R5.1 132.7,101.6 133,101.9 R17.1 144.55,103.35 v1(149.8,108.6) ; R18.2 150.4,118.9 152.2,117.1
  Top Layer w0.6: R13.1 145.05,112.85 146.55,114.35 146.55,114.85 147.15,115.45 150.55,115.45 152.2,117.1 152.55,117.45 J4.2
  Bottom Layer w0.4: v1@149.7,108.6 151.5,110.4 151.5,115.4 153.525,117.425 J4.2@153.625,117.425
BAL6: C7.1 J4.0 J4.1 J5.2 Q1.2 R1.1 R3.2 U1.4 | length 72.2
  Top Layer w0.4: U1.4 123.8,102.5 124.1,102.2 124.1,101.6 R1.1 126.75,100.7 144.1,100.7 151.1,107.7 151.1,110 ; Q1.2 151.05,109.95 151.1,110 ; R3.2 149.65,112.65 151.1,111.2 151.1,110
  Top Layer w0.6: R3.2@149.75,113.4 150.5,113.4 152.05,114.95 J4.1
  Top Layer w1: J4.0 J4.1
  Bottom Layer w1: J5.2 138.65,108.55 139.4,109.3 145.1,109.3 147,107.4 150.3,107.4 151,108.1 151,108.5 153.6,111.1 J4.0 J4.1
CHASSIS1: H1.1
CHASSIS2: H2.1
CHASSIS3: H3.1
CHASSIS4: H4.1
GND: C1.2 C2.2 C3.2 C4.2 C5.2 C6.2 C7.2 C8.2 C9.2 C10.2 D1.2 D2.1 J1.2 J3.1 J4.7 J5.1 Q2.2 Q4.2 Q5.2 Q7.2 Q9.2 Q11.2 Q13.2 R7.1 R9.1 R24.1 R25.1 R26.1 R40.1 R48.1 R54.1 R64.1 R69.1 R82.1 R83.1 R84.1 R85.1 R86.1 R87.1 R88.1 R89.1 R90.1 U1.11 U3.1 U4.20 | length 34.5
  Top Layer w0.2: R26.1@110.45,117.85 R26.1@110.6,117.7
  Top Layer w0.4: v1(107.6,105.1) 108.3,104.4 D1.2 108.3,104 C5.2 ; U3.1 109.5,106.3 v1(109.3,106.3) 110.1,107.1 C4.2 ; v1(113.194,108.792) 113.194,108.506 113.5,108.2 115.3,108.2 115.5,108 R64.1 ; v1(113.9,115.1) C8.2 ; v1(114.775,125.825) U4.20 ; v1(121.5,101.6) C7.2
  Top Layer w0.6: v1(123.8,106.8) U1.11 ; R85.1 R86.1 R87.1 R88.1 R89.1 R90.1
  Bottom Layer w0.4: v1(107.6,105.1) 108.1,105.1 v1(109.3,106.3) 110.1,107.1
  other v1: 118.8,114.3 120.8,132.85
ICSPCLK: J3.2 U4.18 | length 19.2
  Top Layer w0.2: U4.18 116.075,125.825 v1(117.2,124.7)
  Bottom Layer w0.2: J3.2 114.706,138.106 114.706,136.494 116.5,134.7 116.5,125.4 v1(117.2,124.7)
ICSPDAT: J3.3 U4.19 | length 18.2
  Top Layer w0.2: U4.19 115.475,127.4 115.475,125.325 v1(116.1,124.7)
  Bottom Layer w0.2: J3.3 114.3,136.1 116,134.4 v1@116,124.7
LED: R39.2 U4.2 | length 3.2
  Top Layer w0.2: U4.2 115.4,120.525 115.4,117.95 R39.2
LOADEN1: R81.2 U4.13 | length 11.5
  Top Layer w0.2: U4.13 119.325,128.435 121.2,130.31 121.2,132 121.8,132.6 121.8,136.55 R81.2
LOADEN2: R68.2 U4.12 | length 6.3
  Top Layer w0.2: U4.12 119.975,128.475 121.7,130.2 121.7,131.45 R68.2
LOADEN3: R52.2 U4.11 | length 2.2
  Top Layer w0.2: U4.11 121.15,127.45 121.658,127.45 121.758,127.55 R52.2
LOADEN4: R37.2 U4.8 | length 5.1
  Top Layer w0.2: U4.8 119.325,121.975 119.9,122.55 R37.2
LOADEN5: R22.2 U4.10 | length 3.9
  Top Layer w0.2: U4.10 120.625,119.625 R22.2
LOADEN6: R6.2 U4.3 | length 11.3
  Top Layer w0.2: U4.3 116.075,119.025 v1@116.2,118.9 ; v1(121.4,114.2) 121.4,114.65 R6.2
  Bottom Layer w0.2: v1@116.2,118.9 116.4,118.7 116.4,118.41 120.61,114.2 v1(121.4,114.2)
  other v1: 116.1,118.7
M\C\L\R\: J3.4 R56.1 U4.4 | length 24.7
  Top Layer w0.2: J3.4 112.8,137.8 113.9,136.7 R56.1 ; U4.4 v1(116.725,122.975)
  Bottom Layer w0.2: J3.4 112.8,136.7 115.5,134 115.5,125.399 115.2,125.099 115.2,123.8 116.025,122.975 v1(116.725,122.975)
NetD2_2: D2.2 R39.1 | length 18.8
  Top Layer w0.2: D2.2 101.6,120.2 105.8,116 v1(107.4,116) ; v1(115.8,114.6) R39.1
  Bottom Layer w0.2: v1(107.4,116) 108.8,116 111.1,113.7 114.9,113.7 v1(115.8,114.6)
NetJ1_1: J1.1 R8.1 | length 3.9
  Top Layer w0.4: J1.1 108.75,111.75 109.7,110.8 110.25,110.8 R8.1@110.45,111
NetJ2_1: J2.1 U2.1 | length 4.9
  Top Layer w0.2: U2.1 106.15,126.15 107,127 J2.1
NetJ2_2: J2.2 U2.2 | length 10.4
  Top Layer w0.2: U2.2 105.635,122.465 105.1,123 105.1,124.5 105.5,124.9 105.5,130.3 105.95,130.75 J2.2
NetQ1_1: Q1.1 R3.1 R4.1 | length 22.7
  Top Layer w0.3: R4.1 128.55,114.75 v1(128.6,114.7) ; v1(146.9,113.4) R3.1 147.95,111.95 Q1.1
  Bottom Layer w0.3: v1(128.6,114.7) 129.9,113.4 v1(146.9,113.4)
NetQ1_3: Q1.3 R11.2 R12.2 R13.2 R14.2 R15.2 R16.2 | length 18.8
  Top Layer w0.6: R13.2 R16.2 R14.2 ; R14.2@145.05,109.95 146,110.9 Q1.3
NetQ2_1: Q2.1 R6.1 R9.2 | length 3.6
  Top Layer w0.3: R6.1 126.15,114.25 Q2.1
NetQ2_3: Q2.3 R4.2 | length 3
  Top Layer w0.3: R4.2 127.6,115.15 127.6,114.4 128.15,113.85 Q2.3
NetQ3_1: Q3.1 R18.1 R19.1 | length 22.5
  Top Layer w0.3: R19.1 128.55,119.75 v1(128.6,119.7) ; v1(146.9,118.9) R18.1 147.95,117.45 Q3.1
  Bottom Layer w0.3: v1(128.6,119.7) 129.4,118.9 v1(146.9,118.9)
NetQ3_3: Q3.3 R28.2 R29.2 R30.2 R31.2 R32.2 R33.2 | length 18.8
  Top Layer w0.6: R28.2 R29.2 R30.2 R31.2 R32.2 R33.2 ; R33.2@145.05,115.45 146,116.4 Q3.3
NetQ4_1: Q4.1 R22.1 R24.2 | length 3.6
  Top Layer w0.3: R22.1 126.15,119.25 Q4.1
NetQ4_3: Q4.3 R19.2 | length 3
  Top Layer w0.3: R19.2 127.6,120.15 127.6,119.4 128.15,118.85 Q4.3
NetQ5_1: Q5.1 R26.2 U2.3 | length 5.9
  Top Layer w0.2: U2.3@112.15,122.465 112.15,116.6 Q5.1@112.2,116.55
NetQ6_1: Q6.1 R34.1 R35.1 | length 22.2
  Top Layer w0.3: R35.1 128.65,124.75 v1(128.7,124.7) ; v1(146.9,124.4) R34.1 147.95,122.95 Q6.1
  Bottom Layer w0.3: v1(128.7,124.7) 129,124.4 v1(146.9,124.4)
NetQ6_3: Q6.3 R42.2 R43.2 R44.2 R45.2 R46.2 R47.2 | length 18.8
  Top Layer w0.6: R42.2 R43.2 R44.2 R47.2 ; R47.2@145.05,120.95 146,121.9 Q6.3
NetQ7_1: Q7.1 R37.1 R40.2 | length 3.6
  Top Layer w0.3: R37.1 126.25,124.25 Q7.1
NetQ7_3: Q7.3 R35.2 | length 3
  Top Layer w0.3: R35.2 127.7,125.15 127.7,124.4 128.25,123.85 Q7.3
NetQ8_1: Q8.1 R50.1 R51.1 | length 22.1
  Top Layer w0.3: R51.1 128.65,129.75 v1(128.7,129.7) ; v1(146.9,129.9) R50.1 147.95,128.45 Q8.1
  Bottom Layer w0.3: v1(128.7,129.7) 128.9,129.9 v1(146.9,129.9)
NetQ8_3: Q8.3 R57.2 R58.2 R59.2 R60.2 R61.2 R62.2 | length 18.8
  Top Layer w0.6: R57.2 R58.2 R59.2 R60.2 R61.2 R62.2 ; R62.2@145.05,126.45 146,127.4 Q8.3
NetQ9_1: Q9.1 R52.1 R54.2 | length 3.6
  Top Layer w0.3: R52.1 126.25,129.25 Q9.1
NetQ9_3: Q9.3 R51.2 | length 3
  Top Layer w0.3: R51.2 127.7,130.15 127.7,129.4 128.25,128.85 Q9.3
NetQ10_1: Q10.1 R66.1 R67.1 | length 22.4
  Top Layer w0.3: R67.1 128.65,134.75 v1(128.7,134.7) ; v1(146.9,135.4) R66.1 147.95,133.95 Q10.1
  Bottom Layer w0.3: v1(128.7,134.7) 129.4,135.4 v1(146.9,135.4)
NetQ10_3: Q10.3 R70.2 R71.2 R72.2 R73.2 R74.2 R75.2 | length 19.1
  Top Layer w0.6: R70.2 R71.2 R72.2 R73.2 R74.2 R75.2 145.05,131.95 146,132.9 Q10.3
NetQ11_1: Q11.1 R68.1 R69.2 | length 3.6
  Top Layer w0.3: R68.1 126.25,134.25 Q11.1
NetQ11_3: Q11.3 R67.2 | length 3
  Top Layer w0.3: R67.2 127.7,135.15 127.7,134.4 128.25,133.85 Q11.3
NetQ12_1: Q12.1 R77.1 R78.1 | length 22.6
  Top Layer w0.3: R78.1 128.65,139.75 v1(128.7,139.7) ; v1(146.9,140.9) R77.1 147.95,139.45 Q12.1
  Bottom Layer w0.3: v1(128.7,139.7) 129.9,140.9 v1(146.9,140.9)
NetQ12_3: Q12.3 R85.2 R86.2 R87.2 R88.2 R89.2 R90.2 | length 19.1
  Top Layer w0.6: R85.2 R86.2 R87.2 R90.2 145.75,138.4 Q12.3
NetQ13_1: Q13.1 R81.1 R84.2 | length 3.6
  Top Layer w0.3: R81.1 126.25,139.25 Q13.1
NetQ13_3: Q13.3 R78.2 | length 3
  Top Layer w0.3: R78.2 127.7,140.15 127.7,139.4 128.25,138.85 Q13.3
NetR1_2: R1.2 R7.2 U1.5 | length 13
  Top Layer w0.2: R7.2 121.3,106.5 121.9,105.9 124.3,105.9 125.07,105.13 U1.5 125.07,102.73 125.4,102.4 126.6,102.4 127.4,101.6 R1.2
NetR2_1: R2.1 R10.2 U1.7 | length 5.3
  Top Layer w0.2: U1.7 127.61,104.41 128.25,105.05 R10.2 R2.1
NetR5_2: R5.2 R10.1 U1.6 | length 6.3
  Top Layer w0.2: U1.6 126.34,103.26 127.2,102.4 128.85,102.4 R5.2 129.65,103.3 R10.1
NetR17_2: R17.2 R25.2 U1.10 | length 13.1
  Top Layer w0.2: R25.2 124.7,110.2 125.07,109.83 U1.10 125.07,107.23 125.6,106.7 132.1,106.7 133,105.8 R17.2
NetR20_1: R20.1 R27.2 U1.8 | length 4.7
  Top Layer w0.2: R27.2 128.25,110.15 127.61,109.51 U1.8 128.1,108.6 128.8,107.9 R20.1
NetR23_2: R23.2 R27.1 U1.9 | length 12
  Top Layer w0.2: R27.1 126.34,110.69 U1.9 126.34,107.46 126.7,107.1 R23.2@134.7,107.1
NetR36_2: R36.2 R48.2 U1.3 | length 9.9
  Top Layer w0.2: R48.2 118.9,105 119.3,105.4 122.1,105.4 122.53,104.97 U1.3 122.53,102.73 122.3,102.5 121.85,102.5 121.65,102.3 121,102.3 R36.2@120.3,101.6
NetR38_1: R38.1 R49.2 U1.1 | length 6.1
  Top Layer w0.2: R38.1 115.25,103.55 115.5,103.3 R49.2 117.05,104.1 118.9,104.1 119.2,103.8 U1.1
NetR41_2: R41.2 R49.1 U1.2 | length 7
  Top Layer w0.2: R41.2 R49.1 118.85,102.4 120.4,102.4 121.26,103.26 U1.2
NetR53_2: R53.2 R64.2 U1.12 | length 10.2
  Top Layer w0.2: R53.2@114.4,109 115.2,109 115.4,108.8 117.15,108.8 R64.2 118.7,108 119.7,107 122,107 122.53,107.53 U1.12
NetR55_1: R55.1 R65.2 U1.14 | length 4.3
  Top Layer w0.2: R55.1 R65.2 118.55,109.75 119.7,108.6 U1.14
NetR63_2: R63.2 R65.1 U1.13 | length 5.3
  Top Layer w0.2: R65.1 118.55,111.45 118.85,111.15 R63.2 120.35,110.2 120.8,110.2 121.26,109.74 U1.13
NetR76_1: R76.1 R80.2 | length 1.6
  Top Layer w0.2: R76.1 R80.2
RX: Q5.3 R21.1 U4.5 | length 14.8
  Top Layer w0.2: R21.1@110.45,112.7 110.45,113.85 111.25,114.65 112.183,114.65 112.9,115.367 112.9,116.9 113.1,117.1 113.1,119.5 v1(113.2,119.6) ; v1(117.1,118.7) 117.375,118.975 U4.5
  Bottom Layer w0.2: v1@113.2,119.5 116.3,119.5 v1(117.1,118.7)
TX: R8.2 U4.6 | length 14.5
  Top Layer w0.2: R8.2@112.15,111 112.35,110.8 113.1,110.8 116.9,114.6 116.9,117.2 117.975,118.275 117.975,120.5 U4.6 v1(118.025,122.225)
VBAT1: C9.1 R79.1 R82.2 U4.14 | length 14.6
  Top Layer w0.2: U4.14 118.675,128.775 119.2,129.3 v1(119.2,129.4) 119.5,129.7 C9.1 ; v1(119.45,137.45) R79.1 R82.2
  Bottom Layer w0.2: v1(119.2,129.4) 119.45,129.65 v1(119.45,137.45)
VBAT2: C10.1 R80.1 R83.2 U4.15 | length 14.5
  Top Layer w0.2: R80.1 R83.2 118.9,136.6 v1(118.4,137.1) ; C10.1 117.9,129.7 v1(118.2,129.4) 118.2,128.9 118.025,128.725 U4.15
  Bottom Layer w0.2: v1(118.2,129.4) 118.2,130.3 118.2,130.808 118.2,136.9 v1(118.4,137.1)
VBAT3: C6.1 R55.2 U4.9 | length 12.5
  Top Layer w0.2: R55.2 116.2,112.2 117.9,113.9 117.9,116.5 118.1,116.7 119.424,116.7 120,116.7 C6.1 120.8,118.1 119.975,118.925 U4.9
VBAT4: C3.1 R38.2 U4.7 | length 18.6
  Top Layer w0.2: R38.2 113.1,106.55 113.1,107.893 112.494,108.499 112.494,109.594 117.4,114.5 117.4,116.8 118.675,118.075 U4.7
VBAT5: C2.1 R20.2 U4.16 | length 31.1
  Top Layer w0.2: C2.1 116.3,129.9 117.375,128.825 U4.16 117.5,127.325 117.5,126.408 119.508,124.4 v1(120.2,124.4) ; R20.2 v1(132.3,107.9)
  Bottom Layer w0.2: v1(120.2,124.4) 125.7,118.9 125.7,114.5 v1(132.3,107.9)
VBAT6: C1.1 R2.2 U4.17 | length 34.9
  Top Layer w0.2: C1.1 114.7,129.8 115.1,129.4 115.9,129.4 116.725,128.575 U4.17 116.725,126.175 v1(118.8,124.1) ; v1(127.2,106) 130.35,106 R2.2
  Bottom Layer w0.2: v1(118.8,124.1) 124.7,118.2 124.7,113.9 127.2,111.4 v1(127.2,106)
VCC: C5.1 C8.1 J3.5 R21.2 R56.2 U2.4 U3.2 U4.1 | length 48.5
  Top Layer w0.4: J3.5 111.3,137.5 112.6,136.2 112.6,134.8 113.25,134.15 R56.2 113.7,133.95 113.7,124.17 113.265,123.735 114.775,122.225 U4.1 114.775,119.275 113.9,118.4 113.9,118 C8.1@114.1,117.8 ; C5.1 U3.2 110.45,104.15 110.2,104.4 109.7,104.4 108.1,106 107.6,106 106.9,106.7 106.9,107.5 108.6,109.2 110.5,109.2 111.3,110 111.3,111.85 112.15,112.7 113.1,112.7 114.8,114.4 114.8,116.9 C8.1

## Polygon pours and split planes (outlines as drawn)
GND on Bottom Layer "GND" (solid, pour order 4): 99,142 99,100.5 162.5,100.5 162.5,142
GND on Top Layer "GND" (solid, pour order 3): 107,142 107,119.5 99,119.5 99,100.5 162.5,100.5 162.5,142

## Other copper
Bottom Layer:
  pour cut-out: 99,120.2 100.1,120.2 103.2,117.1 108,117.1 111.9,121 111.9,133.5 108.9,136.5 102.9,136.5 99,132.6

## Silkscreen, mask and mechanical layers (free items; w line width, h text height)
Top Overlay:
  text "6MS Slave" at 152.4,133 h2 r90
  text "Kron Tech" at 153.9,133 h1.5 r90
  text "Rev 2 Jan 2021" at 155.5,133 h1.4 r90
  text "-" at 160.2,132.7 h3
  text "+" at 160.3,107 h3
Mechanical 1:
  lines w0.254: 103.493,107.493 cw(c103.846,107.846) 104.2,108.2 ; 103.5,107.475 105.7,105.275 105.7,101.6 ccw(c106.2,101.6) 106.7,101.6 106.7,105.7 104.212,108.187 ; 98.5,100 98.5,142.5 163,142.5 163,100 98.5,100 ; 101.5,122.7 cw(c101.854,123.054) 102.207,123.407 106.607,119.007 cw(c106.254,118.654) 105.9,118.3 101.5,122.7

## Dimensions
163,100 to 163,142.5 on Mechanical 1
98.5,100 to 163,100 on Mechanical 1